# Altium PCB PCB1.PcbDoc
Units mm, origin at the board's own origin, x right, y up, seen from the top; angles counter-clockwise.
Board outline 32.13 x 24.26 mm, 2 copper layers (Top Layer, Bottom Layer); 8 components, 8 nets, 28 pads, 6 vias.
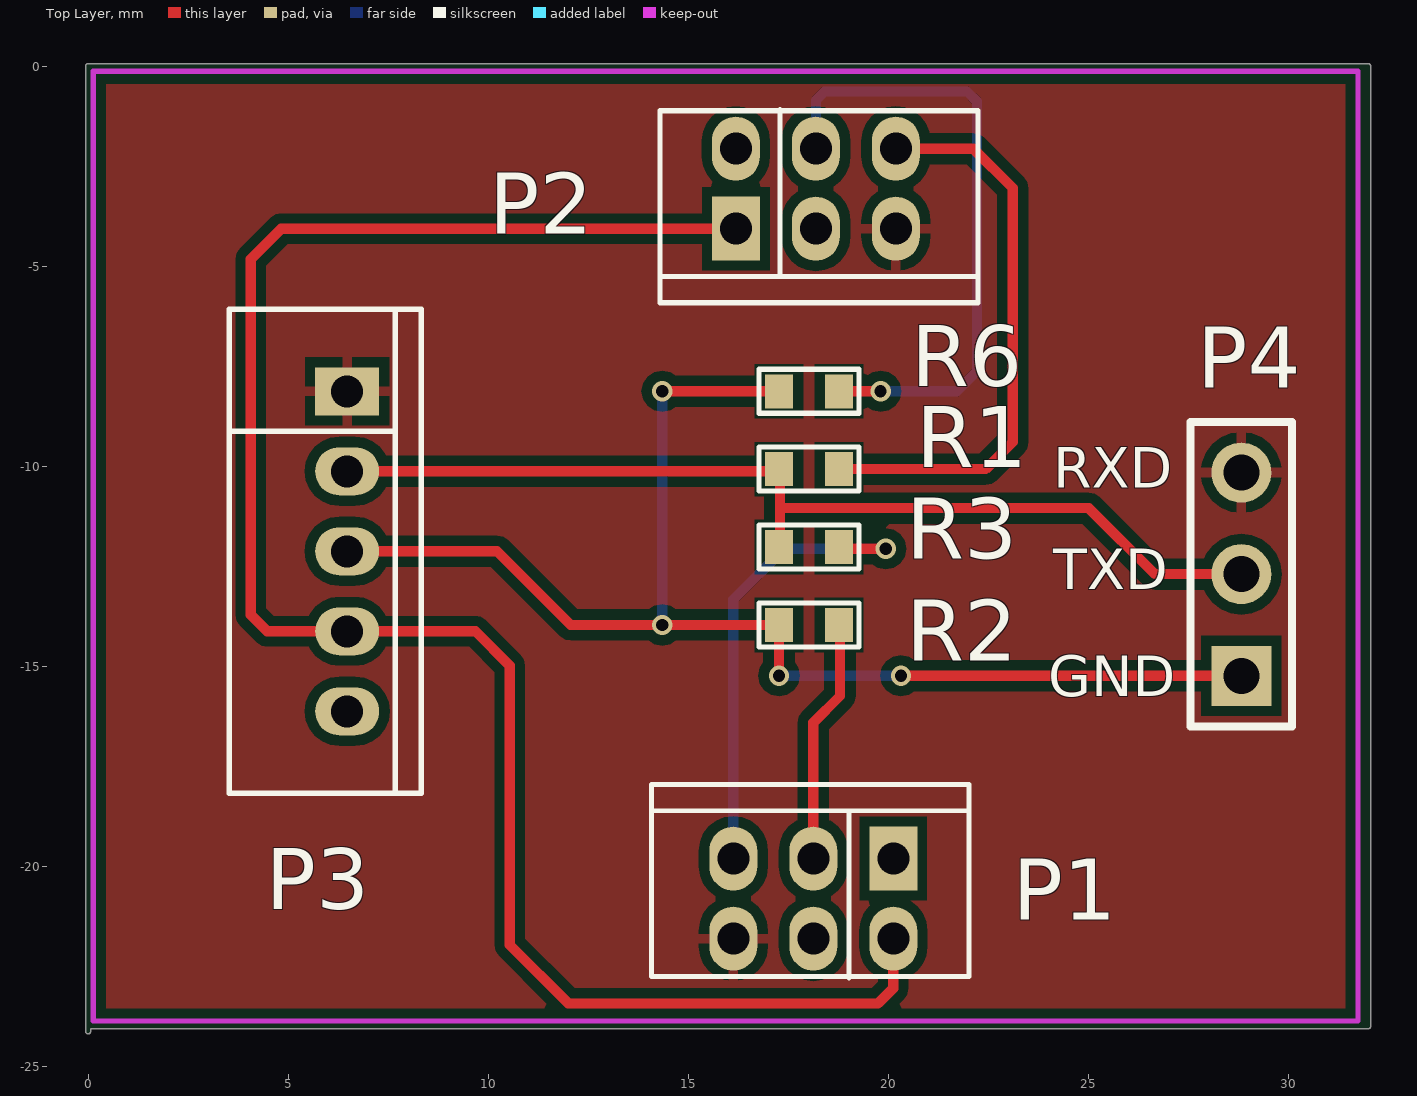
[diagram p0: Top Layer view]
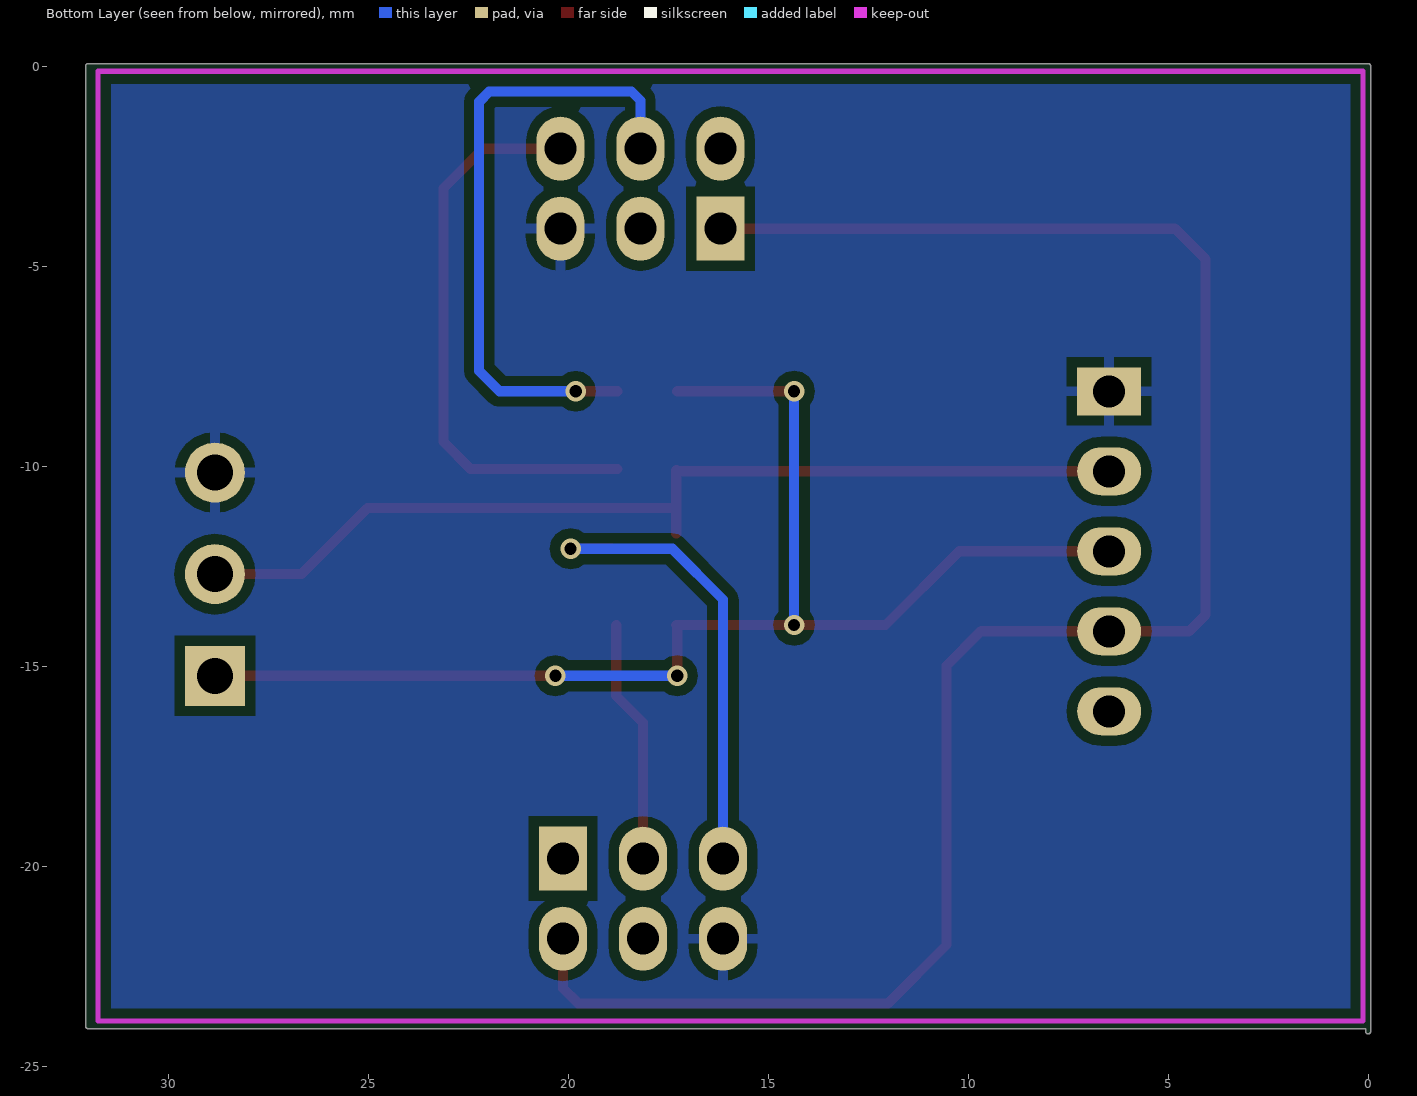
[diagram p1: Bottom Layer view, seen from below]

## Layer stack, top to bottom
Top Layer: signal copper 0.0356
Dielectric: dielectric 0.32, FR-4, Dk 4.8
Bottom Layer: signal copper 0.0356

## Board outline
-0.064,-24.13 -0.064,0 cw(c0,0) 0,0.064 32,0.064 cw(c32,0) 32.064,0 32.064,-24 cw(c32,-24) 32,-24.064 0.064,-24.064 0.064,-24.13 cw(c0,-24.13)

## Design rules (kind name [scope] priority, off if disabled: settings)
Clearance [All] p1: gap=0.254
PolygonConnect [All] p1: connectstyle=Relief reliefconductorwidth=0.254 reliefentries=4 polygonreliefangle="90 Angle"
RoutingVias [All] p1: holewidth=0.711 width=1.27 viastyle="Through Hole" minholewidth=0.711 minwidth=1.27 maxholewidth=0.711 maxwidth=1.27
SilkscreenOverComponentPads [All] p1: minsilkscreentomaskgap=0.254
SolderMaskExpansion [All] p1: expansion=0.102
Width [All] p1: maxlimit=0.254 minlimit=0.254 preferedwidth=0.254
27 further rules are at their usual default settings.

## Components (designator, comment, footprint, x,y, rotation, side; value= is the part's Value field where it differs from the comment)
P1 "Header 3X2" 3x2X2MM 16.129,-19.812 r0 top
P2 "Header 3X2" 3x2X2MM 20.193,-4.064 r180 top
P3 "Header 6" 5X2MMZ 6.477,-8.128 r270 top
P4 "Header 3" HDR1X3 28.829,-15.24 r90 top
R1 "1K" 0603R 17.272,-10.075 r0 top
R2 "1K" 0603R 18.772,-13.97 r180 top
R3 "1K" 0603R 18.772,-12.023 r180 top
R6 "1K" 0603R 17.272,-8.128 r0 top

## Footprints (in the part's own frame and the unit in brackets; to place one, negate y for a bottom-side part, rotate by r counter-clockwise, add the part's x,y. Pads: shape width x height; smd on the part's side, far side on the other; paste and mask are expansions set on the pad)
3x2X2MM [mm]
  rect 1.2x1.6 hole 0.8: 1(4,0)
  oval 1.2x1.6 hole 0.8: 2(4,-2) 3(2,0) 4(2,-2) 5(0,0) 6(0,-2)
  silkscreen extent -2.05,-2.98 5.89,1.85
5X2MMZ [mm]
  rect 1.2x1.6 hole 0.8: 1(0,0)
  oval 1.2x1.6 hole 0.8: 2(2,0) 3(4,0) 4(6,0) 5(8,0)
  silkscreen extent -2.05,-2.95 10.05,1.85
0603R [mm]
  rect 0.7x0.85 smd: 1(0,0) 2(1.5,0)
  silkscreen extent -0.5,-0.55 2,0.55
HDR1X3 [mm] "Connector; Header; 3 Position"
  rect 1.5x1.5 hole 0.9: 1(0,0)
  round 1.5 hole 0.9: 2(2.54,0) 3(5.08,0)
  silkscreen extent -1.27,-1.27 6.35,1.27

## Part data
P1 P2: "Header, 3-Pin, Dual row"
P3: "Header, 6-Pin"
P4: "Header, 3-Pin"
R1 R2 R3 R6: library part Res2, "Resistor"

## Via types
v1: diameter 0.508, hole 0.305, Top Layer to Bottom Layer, tented both sides, 6 vias

## Nets (pads, with @x,y where several pads share a name; then routed paths per layer and width w, separated by ;. In a path a pad name is that pad's centre, name@x,y a point inside that pad or via, vN(x,y) a via of type N, cw(c..) or ccw(c..) an arc to the next point about the centre after c; other vN are vias at no path point)
3V3: P1.2 P2.1 P3.4 | length 46.9
  Top Layer w0.254: P2.1 4.826,-4.064 4.064,-4.826 4.064,-13.716 4.476,-14.128 P3.4 9.683,-14.128 10.541,-14.986 10.541,-21.971 12.002,-23.431 19.748,-23.431 20.129,-23.051 P1.2
GND: P1.6 P2.5 P3.1 P4.3
NetP1_3: P1.3 R2.1 | length 6.1
  Top Layer w0.254: P1.3 18.129,-16.415 18.796,-15.748 R2.1@18.796,-13.97
NetP1_5: P1.5 R3.1 | length 11.8
  Top Layer w0.254: R3.1@18.923,-12.065 v1(19.939,-12.065)
  Bottom Layer w0.254: P1.5 16.129,-13.335 17.399,-12.065 v1(19.939,-12.065)
NetP2_4: P2.4 R6.2 | length 15.8
  Top Layer w0.254: R6.2 v1(19.812,-8.128)
  Bottom Layer w0.254: P2.4 18.193,-0.857 18.415,-0.635 21.971,-0.635 22.225,-0.889 22.225,-7.62 21.717,-8.128 v1(19.812,-8.128)
NetP2_6: P2.6 R1.2 | length 14.3
  Top Layer w0.254: R1.2 22.437,-10.075 23.114,-9.398 23.114,-3.048 22.13,-2.064 P2.6
RXD: P3.3 P4.1 R2.2 R6.1 | length 33.2
  Top Layer w0.254: P3.3 10.223,-12.128 12.065,-13.97 v1(14.351,-13.97) R2.2 ; v1(14.351,-8.128) R6.1 ; v1(17.272,-15.24) R2.2 ; R2.2@17.296,-13.97 R2.2 ; v1(20.32,-15.24) P4.1
  Bottom Layer w0.254: v1(14.351,-13.97) v1(14.351,-8.128) ; v1(17.272,-15.24) v1(20.32,-15.24)
TXD: P3.2 P4.2 R1.1 R3.2 | length 24.5
  Top Layer w0.254: P3.2 R1.1@17.219,-10.128 ; R3.2@17.296,-11.684 17.296,-11.049 ; R1.1@17.296,-10.099 17.296,-11.049 ; P4.2 26.67,-12.7 25.019,-11.049 17.296,-11.049
pads on no net: P1.1 P1.4 P2.2 P2.3 P3.5

## Polygon pours and split planes (outlines as drawn)
GND on Bottom Layer "Top Layer-No Net" (solid, remove dead copper): -1.143,0 32.258,0 31.75,-0.508 31.75,-24.13 -0.762,-24.13 -1.016,-23.876 -0.762,-23.622 -0.762,0
GND on Top Layer "Top Layer-No Net" (solid, remove dead copper): -0.127,0.254 0.127,0 32.639,0 32.639,-24.003 32.004,-24.638 31.877,-24.765 -0.635,-24.765 -0.635,-0.254 -0.127,0.254

## Keep-outs
Keep-Out Layer:
  lines w0.127: 0.127,-23.876 31.75,-23.876 31.75,-0.127 0.127,-0.127 0.127,-23.876

## Silkscreen, mask and mechanical layers (free items; w line width, h text height)
Top Overlay:
  text "RXD" at 24.13,-10.541 h1.02
  text "TXD" at 24.13,-13.081 h1.02
  text "GND" at 24.003,-15.748 h1.02
Mechanical 1:
  lines w0.127: 0,-24 0,0 32,0 32,-24 0,-24